# Allegro board pc042a_toplevel_16.brd
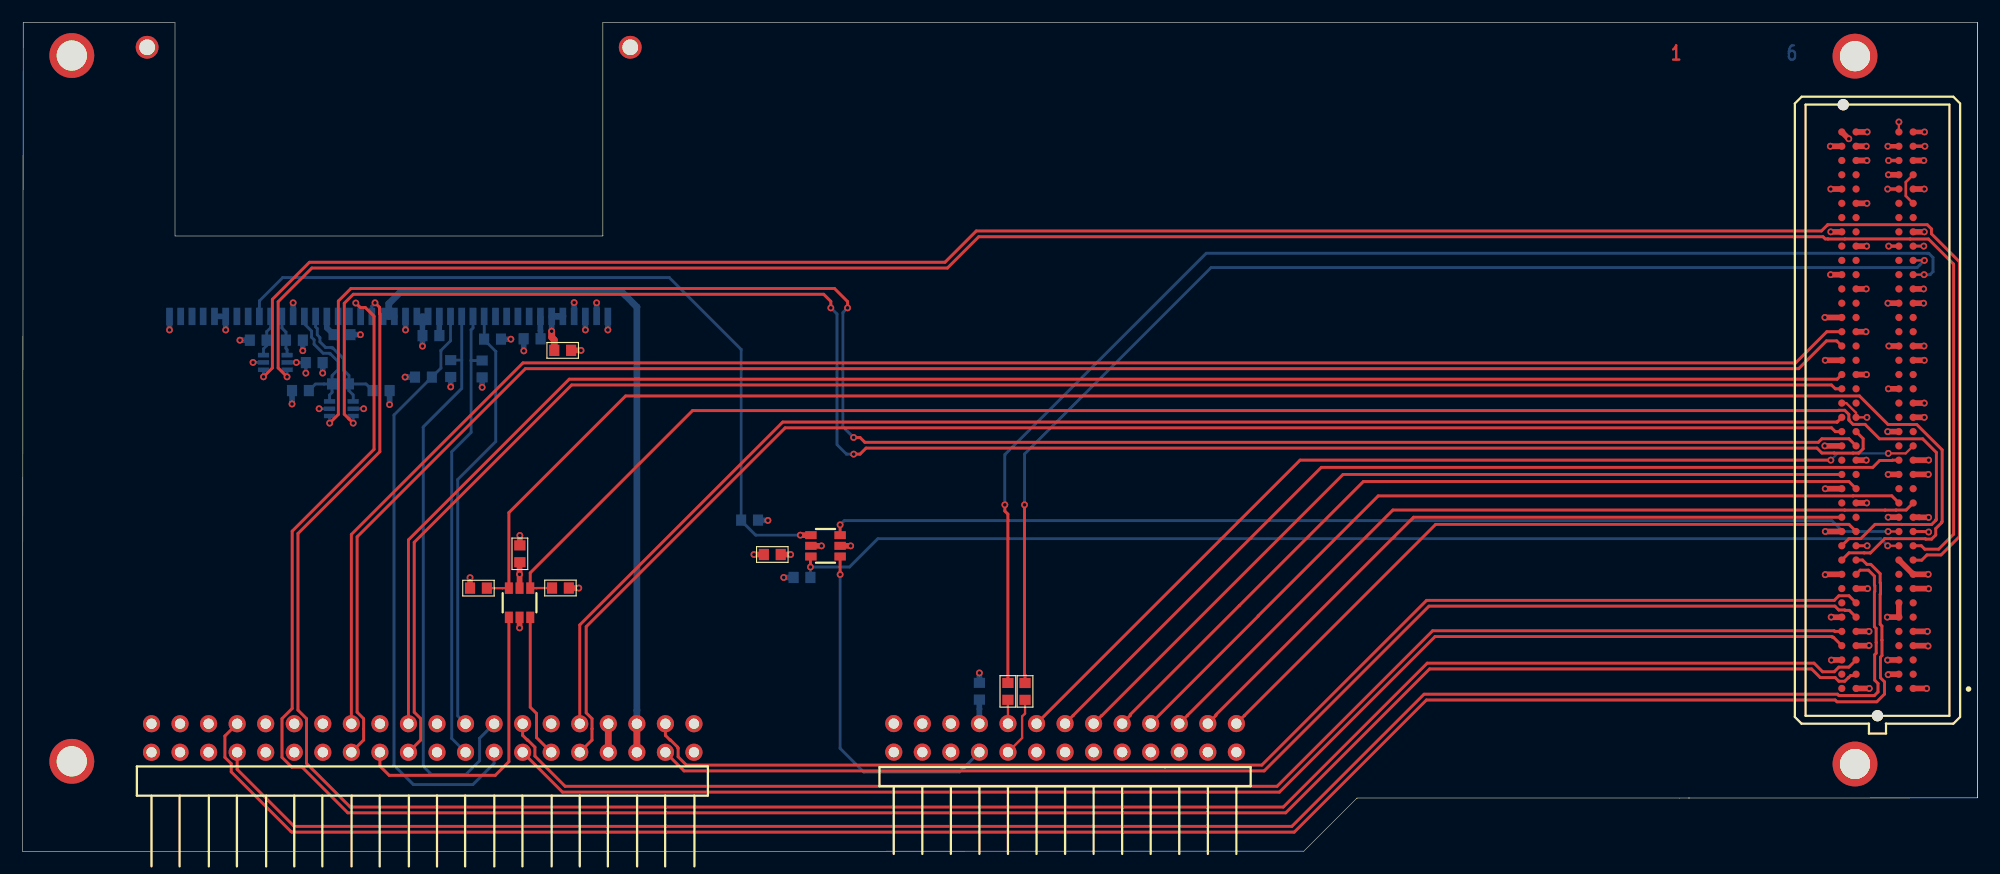
[diagram p0: board, top side]
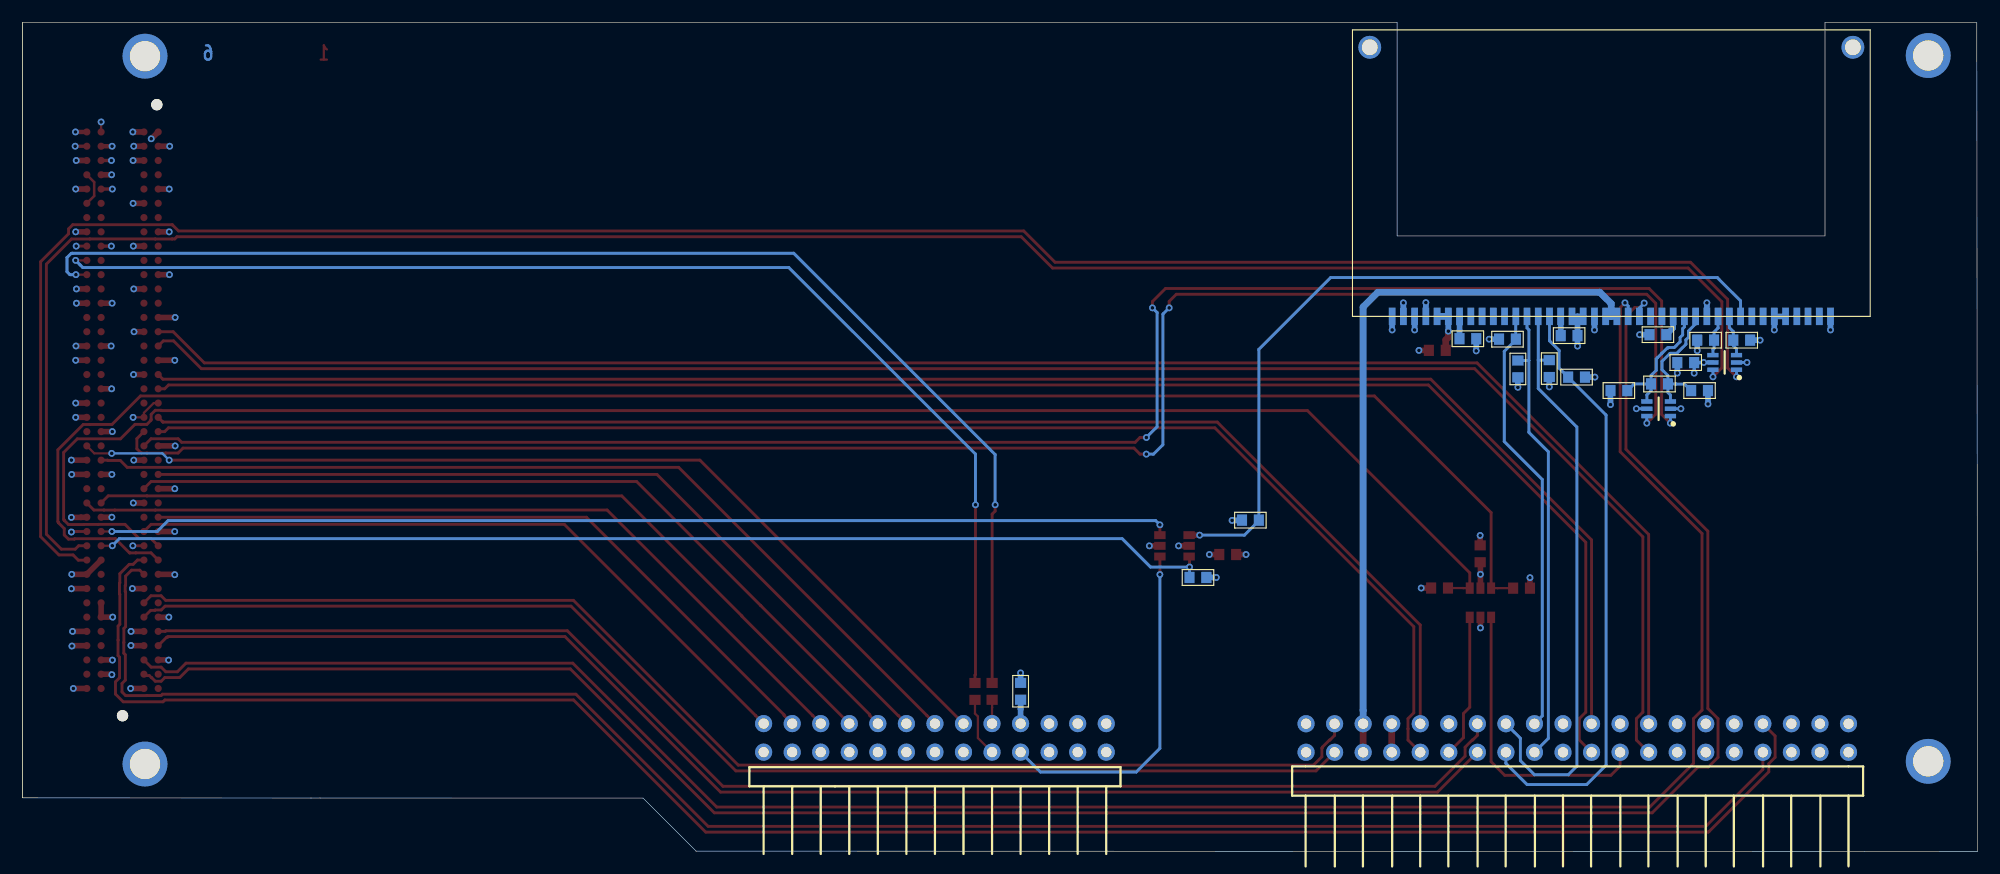
[diagram p1: board, bottom side, seen from below]

Outline 173.93 x 73.79 mm; copper layers: TOP, L2, L3, L4, L5, BOTTOM. Coordinates in mm from the lower left corner of the outline.
Outline path: 173.93,4.79 173.93,73.79 ; 0,0 10.06,0 100.6,0.03 114,0.03 118.73,4.76 147.45,4.76 148.27,4.76 148.27,4.76 173.93,4.78 173.93,4.8 173.93,73.79 51.64,73.79 51.64,54.8 51.63,54.79 13.57,54.79 13.57,73.79 0.07,73.79 0,0

## Design rules (mm)
net group FMC_LA: nets FMC_LA<1> FMC_LA<2> FMC_LA<17> FMC_LA<18> FMC_LA<20> FMC_LA<22> FMC_LA<23> FMC_LA<24> FMC_LA<25> FMC_LA<26> FMC_LA<27> FMC_LA<28> FMC_LA<29> FMC_LA<30> FMC_LA<31> FMC_LA<32> FMC_LA<33> RDATA2 RDATA3 RDATA6 RDATA7
net group FMC_LA*: nets FMC_LA*<1> FMC_LA*<2> FMC_LA*<7> FMC_LA*<8> FMC_LA*<9> FMC_LA*<10> FMC_LA*<11> FMC_LA*<12> FMC_LA*<13> FMC_LA*<14> FMC_LA*<17> FMC_LA*<18> FMC_LA*<20> FMC_LA*<22> FMC_LA*<23> FMC_LA*<24> FMC_LA*<25> FMC_LA*<26> FMC_LA*<27> FMC_LA*<28> FMC_LA*<29> FMC_LA*<30> FMC_LA*<31> FMC_LA*<32> FMC_LA*<33>

## Placement (name value [footprint] x y rotation side)
C3  100nF  [C0603]  48.06 44.61 180 top
C4  100nF  [C0603]  45.34 45.64 0 bottom
C5  100nF  [C0603]  36.34 45.92 0 bottom
C6  100nF  [C0603]  28.43 46 180 bottom
C7  1.0uF  [C0603]  66.71 26.44 0 top
C8  100nF  [C0603]  25.96 43.52 180 bottom
C9  1.0uF  [C0603]  44.25 26.5 270 top
IC1  -  [SOP65P210X110-6N]  28.37 39.41 0 bottom
IC2  -  [SOP65P210X110-6N]  22.49 43.53 0 bottom
J1  -  [CONHE13C2X20M]  11.48 11.37 90 bottom
J2  -  [CONHE13C2X13M]  77.51 11.39 270 bottom
J3  -  [SAMTEC_ASP-134606-01]  165.03 39.28 270 top
LK1  -  [FXG_M2-7]  163.03 70.79 0 top
LK2  -  [FXG_M2-7]  163.03 7.79 0 top
LK3  -  [FXG_M2-7]  4.39 8.03 0 top
LK4  -  [FXG_M2-7]  4.39 70.85 0 top
NOREF  -  []  -15.09 -78.07 0 top
NOREF#2  -  []  173.93 4.79 90 top
NOREF#3  -  []  0 0 89.9 top
NOREF#4  -  []  0.07 73.79 0 top
R1  100  [C0603]  28.29 41.61 180 bottom
R2  390  [C0603]  31.91 41.03 0 bottom
R3  390  [C0603]  24.73 41.03 180 bottom
R4  10k  [C0603]  35.67 42.23 180 bottom
R5  10k  [C0603]  38.1 42.98 270 bottom
R6  10k  [C0603]  40.89 42.95 270 bottom
R7  10k  [C0603]  41.82 45.6 0 bottom
R8  00  [C0603]  85.13 14.26 90 bottom
R9  00  [C0603]  89.19 14.25 90 top
R10  00  [C0603]  87.67 14.25 90 top
R11  1k  [C0603]  69.35 24.39 180 bottom
R12  1k  [C0603]  40.57 23.44 180 top
R13  1k  [C0603]  47.86 23.45 0 top
R14  1k  [C0603]  64.69 29.49 0 bottom
R15  24  [C0603]  24.19 45.51 180 bottom
R16  24  [C0603]  20.98 45.51 0 bottom
U1  -  [SK_SAMTEC_MB1_140_01]  13.08 47.63 270 bottom
U2  -  [SOT23_6]  72.74 26.26 90 top
U3  -  [SOT23_6]  43.27 20.84 0 top

## Library data of the parts
C3-C6 C8 = CAPCERSMDCL2: part number: CAPCERSMDCL2_0603-100NF,16V; tolerance: 10%
C7 C9 = CAPCERSMDCL2: part number: CAPCERSMDCL2_0603-1.0UF,6.3V; tolerance: 10%
IC1 IC2 = ADCMP604: part number: ADCMP604BKSZ
J1 = CON40P: part number: CON40P-BARC2X20
J2 = CON26P: part number: CON26P-BARC2X13
J3 = CON160P_40CDGH: part number: ASP-134606-01
LK1-LK4 = 1-HOLE: part number: 1-HOLE_FXG2-7-BASE
R1 = RSMD0603: part number: RSMD0603_1/10W-100,1%; tolerance: 1%
R2 R3 = RSMD0603: part number: RSMD0603_1/10W-390,1%; tolerance: 1%
R4-R7 = RSMD0603: part number: RSMD0603_1/10W-10K,1%; tolerance: 1%
R8-R10 = RSMD0603: part number: RSMD0603_-00,
R11-R14 = RSMD0603: part number: RSMD0603_1/10W-1K,1%; tolerance: 1%
R15 R16 = RSMD0603: part number: RSMD0603_1/10W-24,1%; tolerance: 1%
U1 = SK-SAMTEC-40PIN-MB1: part number: SK-SAMTEC-40PIN-MB1_RT-SMT-SAMTEC
U2 U3 = SN74AUC2G07: part number: SN74AUC2G07_SOT-TI

## Footprints (pads in the part's own frame, mm; a bottom-side part is the same pattern mirrored in y, then rotated)
C0603
  rect 0.9x1 smd: 1(-0.75,0) 2(0.75,0)
CONHE13C2X13M
  round 1.524 hole 0.914: 1(0,0) 2(2.54,0) 3(0,-2.54) 4(2.54,-2.54) 5(0,-5.08) 6(2.54,-5.08) 7(0,-7.62) 8(2.54,-7.62) 9(0,-10.16) 10(2.54,-10.16) 11(0,-12.7) 12(2.54,-12.7) 13(0,-15.24) 14(2.54,-15.24) 15(0,-17.78) 16(2.54,-17.78) 17(0,-20.32) 18(2.54,-20.32) 19(0,-22.86) 20(2.54,-22.86) 21(0,-25.4) 22(2.54,-25.4) 23(0,-27.94) 24(2.54,-27.94) 25(0,-30.48) 26(2.54,-30.48)
CONHE13C2X20M
  round 1.524 hole 0.914: 1(0,0) 2(-2.54,0) 3(0,2.54) 4(-2.54,2.54) 5(0,5.08) 6(-2.54,5.08) 7(0,7.62) 8(-2.54,7.62) 9(0,10.16) 10(-2.54,10.16) 11(0,12.7) 12(-2.54,12.7) 13(0,15.24) 14(-2.54,15.24) 15(0,17.78) 16(-2.54,17.78) 17(0,20.32) 18(-2.54,20.32) 19(0,22.86) 20(-2.54,22.86) 21(0,25.4) 22(-2.54,25.4) 23(0,27.94) 24(-2.54,27.94) 25(0,30.48) 26(-2.54,30.48) 27(0,33.02) 28(-2.54,33.02) 29(0,35.56) 30(-2.54,35.56) 31(0,38.1) 32(-2.54,38.1) 33(0,40.64) 34(-2.54,40.64) 35(0,43.18) 36(-2.54,43.18) 37(0,45.72) 38(-2.54,45.72) 39(0,48.26) 40(-2.54,48.26)
FXG_M2-7
  round 3.988 hole 2.692: 1(0,0)
SAMTEC_ASP-134606-01
  round 1 hole 1.3 unplated: (-27.19,-3.05) (27.19,0)
  round 0.64 smd: C1(24.765,3.175) C2(23.495,3.175) C3(22.225,3.175) C4(20.955,3.175) C5(19.685,3.175) C6(18.415,3.175) C7(17.145,3.175) C8(15.875,3.175) C9(14.605,3.175) C10(13.335,3.175) C11(12.065,3.175) C12(10.795,3.175) C13(9.525,3.175) C14(8.255,3.175) C15(6.985,3.175) C16(5.715,3.175) C17(4.445,3.175) C18(3.175,3.175) C19(1.905,3.175) C20(0.635,3.175) C21(-0.635,3.175) C22(-1.905,3.175) C23(-3.175,3.175) C24(-4.445,3.175) C25(-5.715,3.175) C26(-6.985,3.175) C27(-8.255,3.175) C28(-9.525,3.175) C29(-10.795,3.175) C30(-12.065,3.175) C31(-13.335,3.175) C32(-14.605,3.175) C33(-15.875,3.175) C34(-17.145,3.175) C35(-18.415,3.175) C36(-19.685,3.175) C37(-20.955,3.175) C38(-22.225,3.175) C39(-23.495,3.175) C40(-24.765,3.175) D1(24.765,1.905) D2(23.495,1.905) D3(22.225,1.905) D4(20.955,1.905) D5(19.685,1.905) D6(18.415,1.905) D7(17.145,1.905) D8(15.875,1.905) D9(14.605,1.905) D10(13.335,1.905) D11(12.065,1.905) D12(10.795,1.905) D13(9.525,1.905) D14(8.255,1.905) D15(6.985,1.905) D16(5.715,1.905) D17(4.445,1.905) D18(3.175,1.905) D19(1.905,1.905) D20(0.635,1.905) D21(-0.635,1.905) D22(-1.905,1.905) D23(-3.175,1.905) D24(-4.445,1.905) D25(-5.715,1.905) D26(-6.985,1.905) D27(-8.255,1.905) D28(-9.525,1.905) D29(-10.795,1.905) D30(-12.065,1.905) D31(-13.335,1.905) D32(-14.605,1.905) D33(-15.875,1.905) D34(-17.145,1.905) D35(-18.415,1.905) D36(-19.685,1.905) D37(-20.955,1.905) D38(-22.225,1.905) D39(-23.495,1.905) D40(-24.765,1.905) G1(24.765,-1.905) G2(23.495,-1.905) G3(22.225,-1.905) G4(20.955,-1.905) G5(19.685,-1.905) G6(18.415,-1.905) G7(17.145,-1.905) G8(15.875,-1.905) G9(14.605,-1.905) G10(13.335,-1.905) G11(12.065,-1.905) G12(10.795,-1.905) G13(9.525,-1.905) G14(8.255,-1.905) G15(6.985,-1.905) G16(5.715,-1.905) G17(4.445,-1.905) G18(3.175,-1.905) G19(1.905,-1.905) G20(0.635,-1.905) G21(-0.635,-1.905) G22(-1.905,-1.905) G23(-3.175,-1.905) G24(-4.445,-1.905) G25(-5.715,-1.905) G26(-6.985,-1.905) G27(-8.255,-1.905) G28(-9.525,-1.905) G29(-10.795,-1.905) G30(-12.065,-1.905) G31(-13.335,-1.905) G32(-14.605,-1.905) G33(-15.875,-1.905) G34(-17.145,-1.905) G35(-18.415,-1.905) G36(-19.685,-1.905) G37(-20.955,-1.905) G38(-22.225,-1.905) G39(-23.495,-1.905) G40(-24.765,-1.905) H1(24.765,-3.175) H2(23.495,-3.175) H3(22.225,-3.175) H4(20.955,-3.175) H5(19.685,-3.175) H6(18.415,-3.175) H7(17.145,-3.175) H8(15.875,-3.175) H9(14.605,-3.175) H10(13.335,-3.175) H11(12.065,-3.175) H12(10.795,-3.175) H13(9.525,-3.175) H14(8.255,-3.175) H15(6.985,-3.175) H16(5.715,-3.175) H17(4.445,-3.175) H18(3.175,-3.175) H19(1.905,-3.175) H20(0.635,-3.175) H21(-0.635,-3.175) H22(-1.905,-3.175) H23(-3.175,-3.175) H24(-4.445,-3.175) H25(-5.715,-3.175) H26(-6.985,-3.175) H27(-8.255,-3.175) H28(-9.525,-3.175) H29(-10.795,-3.175) H30(-12.065,-3.175) H31(-13.335,-3.175) H32(-14.605,-3.175) H33(-15.875,-3.175) H34(-17.145,-3.175) H35(-18.415,-3.175) H36(-19.685,-3.175) H37(-20.955,-3.175) H38(-22.225,-3.175) H39(-23.495,-3.175) H40(-24.765,-3.175)
SK_SAMTEC_MB1_140_01
  round 2.032 hole 1.4: (-23.952,-40.99) (-23.952,1.99)
  rect 1.55x0.6 smd: 1(0,0) 2(0,-1) 3(0,-2) 4(0,-3) 5(0,-4) 6(0,-5) 7(0,-6) 8(0,-7) 9(0,-8) 10(0,-9) 11(0,-10) 12(0,-11) 13(0,-12) 14(0,-13) 15(0,-14) 16(0,-15) 17(0,-16) 18(0,-17) 19(0,-18) 20(0,-19) 21(0,-20) 22(0,-21) 23(0,-22) 24(0,-23) 25(0,-24) 26(0,-25) 27(0,-26) 28(0,-27) 29(0,-28) 30(0,-29) 31(0,-30) 32(0,-31) 33(0,-32) 34(0,-33) 35(0,-34) 36(0,-35) 37(0,-36) 38(0,-37) 39(0,-38) 40(0,-39)
SOP65P210X110-6N
  rect 1x0.4 smd: 1(-1.05,0.65) 2(-1.05,0) 3(-1.05,-0.65) 4(1.05,-0.65) 5(1.05,0) 6(1.05,0.65)
SOT23_6
  rect 0.711x1.016 smd: 1(0,0) 2(0.95,0) 3(1.9,0) 4(1.9,2.6) 5(0.95,2.6) 6(0,2.6)

## Nets
GND_SIGNAL: C3.1(A<0>) C4.1(A<0>) C5.1(A<0>) C6.1(A<0>) C7.1(A<0>) C8.1(A<0>) C9.1(A<0>) IC1.2(VEE) IC2.2(VEE) J1.2(A<1>) J1.5(A<4>) J1.6(A<5>) J1.9(A<8>) J1.10(A<9>) J1.13(A<12>) J1.14(A<13>) J2.6(A<5>) J2.12(A<11>) J2.14(A<13>) J2.16(A<15>) J2.18(A<17>) J2.20(A<19>) J2.22(A<21>) J2.24(A<23>) J2.26(A<25>) J3.C1(C<1>) J3.C4(C<4>) J3.C5(C<5>) J3.C8(C<8>) J3.C9(C<9>) J3.C12(C<12>) J3.C13(C<13>) J3.C16(C<16>) J3.C17(C<17>) J3.C20(C<20>) J3.C21(C<21>) J3.C24(C<24>) J3.C25(C<25>) J3.C28(C<28>) J3.C29(C<29>) J3.C32(C<32>) J3.C33(C<33>) J3.C36(C<36>) J3.C38(C<38>) J3.C40(C<40>) J3.D2(D<2>) J3.D3(D<3>) J3.D6(D<6>) J3.D7(D<7>) J3.D10(D<10>) J3.D13(D<13>) J3.D16(D<16>) J3.D19(D<19>) J3.D22(D<22>) J3.D25(D<25>) J3.D28(D<28>) J3.D37(D<37>) J3.D39(D<39>) J3.G1(G<1>) J3.G4(G<4>) J3.G5(G<5>) J3.G8(G<8>) J3.G11(G<11>) J3.G14(G<14>) J3.G17(G<17>) J3.G20(G<20>) J3.G23(G<23>) J3.G26(G<26>) J3.G29(G<29>) J3.G32(G<32>) J3.G35(G<35>) J3.G38(G<38>) J3.G40(G<40>) J3.H3(H<3>) J3.H6(H<6>) J3.H9(H<9>) J3.H12(H<12>) J3.H15(H<15>) J3.H18(H<18>) J3.H21(H<21>) J3.H24(H<24>) J3.H27(H<27>) J3.H30(H<30>) J3.H33(H<33>) J3.H36(H<36>) J3.H39(H<39>) LK1.1(A<0>) LK2.1(A<0>) LK3.1(A<0>) LK4.1(A<0>) R15.1(A<0>) R16.1(A<0>) U1.1(A<0>) U1.5(A<4>) U1.6(A<5>) U1.12(A<11>) U1.23(A<22>) U1.24(A<23>) U1.37(A<36>) U1.38(A<37>) U1.39(A<38>) U1.40(A<39>) U2.2 U3.2
P1V5A: J1.35(A<34>) J1.36(A<35>) U1.20(A<19>) U1.21(A<20>)
P2V5: C7.2(B<0>) C8.2(B<0>) IC2.5(VCC) J3.G39(G<39>) J3.H40(H<40>) R11.2(B<0>) R12.2(B<0>) R13.2(B<0>) U2.5
P3V3: C9.2(B<0>) J3.C39(C<39>) J3.D32(D<32>) J3.D36(D<36>) J3.D38(D<38>) J3.D40(D<40>) R8.2(B<0>) R14.2(B<0>) U3.5
P5V: J1.17(A<16>)
P12V: J3.C35(C<35>) J3.C37(C<37>)
A0: J1.23(A<22>) R7.1(A<0>) U1.29(A<28>)
A1: J1.24(A<23>) R6.1(A<0>) U1.28(A<27>)
A1+: J1.12(A<11>)
A1-: J1.11(A<10>)
A2: J1.25(A<24>) R5.1(A<0>) U1.27(A<26>)
A2+: J1.4(A<3>)
A2-: J1.3(A<2>)
A3: J1.26(A<25>) R4.1(A<0>) U1.26(A<25>)
BIAS: J1.40(A<39>)
BIAS_GND: J1.39(A<38>)
CA1+: IC2.3(+IN) R16.2(B<0>) U1.10(A<9>)
CA1-: IC2.4(-IN) R15.2(B<0>) U1.11(A<10>)
CCLK_ROC+: J3.G2(G<2>) U1.18(A<17>)
CCLK_ROC-: J3.G3(G<3>) U1.19(A<18>)
CCLK_SEL: U1.4(A<3>)
CCTR+: U1.16(A<15>)
CCTR-: U1.17(A<16>)
CI2C_CLK+: U1.2(A<1>)
CI2C_CLK-: U1.3(A<2>)
CI2C_DAT+: U1.30(A<29>)
CI2C_DAT-: U1.31(A<30>)
CRESET*: R14.1(A<0>) U1.9(A<8>) U2.4(Y)
CTIN+: U1.7(A<6>)
CTIN-: U1.8(A<7>)
CTOUT+: U1.32(A<31>)
CTOUT-: U1.33(A<32>)
CTRIGOUT+: IC1.3(+IN) R1.2(B<0>) R3.1(A<0>) U1.13(A<12>)
CTRIGOUT-: IC1.4(-IN) R1.1(A<0>) R2.1(A<0>) U1.14(A<13>)
DP0_C2M: J3.C2(C<2>)
DP0_C2M*: J3.C3(C<3>)
DP0_M2C: J3.C6(C<6>)
DP0_M2C*: J3.C7(C<7>)
FA1+: IC2.1(Q) J3.C10(C<10>)
FA1-: IC2.6(Q*) J3.C11(C<11>)
FCLK_SEL_IN: J3.H10(H<10>) R12.1(A<0>) U3.6(Y)
FMC_LA*<1>: J3.D9(D<9>)
FMC_LA*<2>: J3.H8(H<8>)
FMC_LA*<7>: J3.H14(H<14>)
FMC_LA*<8>: J3.G13(G<13>)
FMC_LA*<9>: J3.D15(D<15>)
FMC_LA*<10>: J3.C15(C<15>)
FMC_LA*<11>: J3.H17(H<17>)
FMC_LA*<12>: J3.G16(G<16>)
FMC_LA*<13>: J3.D18(D<18>)
FMC_LA*<14>: J3.C19(C<19>)
FMC_LA*<17>: J3.D21(D<21>)
FMC_LA*<18>: J3.C23(C<23>)
FMC_LA*<20>: J3.G22(G<22>)
FMC_LA*<22>: J3.G25(G<25>)
FMC_LA*<23>: J3.D24(D<24>)
FMC_LA*<24>: J3.H29(H<29>)
FMC_LA*<25>: J3.G28(G<28>)
FMC_LA*<26>: J3.D27(D<27>)
FMC_LA*<27>: J3.C27(C<27>)
FMC_LA*<28>: J3.H32(H<32>)
FMC_LA*<29>: J3.G31(G<31>)
FMC_LA*<30>: J3.H35(H<35>)
FMC_LA*<31>: J3.G34(G<34>)
FMC_LA*<32>: J3.H38(H<38>)
FMC_LA*<33>: J3.G37(G<37>)
FMC_LA<1>: J3.D8(D<8>)
FMC_LA<2>: J3.H7(H<7>)
FMC_LA<17>: J3.D20(D<20>)
FMC_LA<18>: J3.C22(C<22>)
FMC_LA<20>: J3.G21(G<21>)
FMC_LA<22>: J3.G24(G<24>)
FMC_LA<23>: J3.D23(D<23>)
FMC_LA<24>: J3.H28(H<28>)
FMC_LA<25>: J3.G27(G<27>)
FMC_LA<26>: J3.D26(D<26>)
FMC_LA<27>: J3.C26(C<26>)
FMC_LA<28>: J3.H31(H<31>)
FMC_LA<29>: J3.G30(G<30>)
FMC_LA<30>: J3.H34(H<34>)
FMC_LA<31>: J3.G33(G<33>)
FMC_LA<32>: J3.H37(H<37>)
FMC_LA<33>: J3.G36(G<36>)
FMC_PRSNT_M2C_L: J3.H2(H<2>)
FMC_PWR_GOOD_FLASH_RST_B: J3.D1(D<1>)
FMC_TCK_BUF: J3.D29(D<29>)
FMC_TDO: J3.D31(D<31>)
FMC_TMS_BUF: J3.D33(D<33>)
FPGA_TDO: J3.D30(D<30>)
FPON: J3.D11(D<11>) R11.1(A<0>) U2.6(Y)
FRESET_IN*: J3.H11(H<11>) R13.1(A<0>) U3.4(Y)
FRESET_OUT*: J3.D12(D<12>) U2.3(A)
FTRIGOUT+: IC1.1(Q) J3.G18(G<18>)
FTRIGOUT-: IC1.6(Q*) J3.G19(G<19>)
GA0: J3.C34(C<34>)
GA1: J3.D35(D<35>)
GBTCLK0_M2C: J3.D4(D<4>)
GBTCLK0_M2C*: J3.D5(D<5>)
IIC_SCL_MAIN: J3.C30(C<30>) R10.2(B<0>)
IIC_SDA_MAIN: J3.C31(C<31>) R9.2(B<0>)
RCLK_ROC+: J1.28(A<27>) J3.H4(H<4>)
RCLK_ROC-: J1.27(A<26>) J3.H5(H<5>)
RCLK_SEL: J1.18(A<17>) U3.1(A)
RCTR+: J1.32(A<31>) J3.H19(H<19>)
RCTR-: J1.31(A<30>) J3.H20(H<20>)
RDATA0: J2.11(A<10>) J3.C18(C<18>)
RDATA1: J2.13(A<12>) J3.D17(D<17>)
RDATA2: J2.15(A<14>) J3.H16(H<16>)
RDATA3: J2.17(A<16>) J3.G15(G<15>)
RDATA4: J2.19(A<18>) J3.D14(D<14>)
RDATA5: J2.21(A<20>) J3.C14(C<14>)
RDATA6: J2.23(A<22>) J3.H13(H<13>)
RDATA7: J2.25(A<24>) J3.G12(G<12>)
RI2C_CLK+: J1.22(A<21>)
RI2C_CLK-: J1.21(A<20>)
RI2C_DAT+: J1.38(A<37>) J3.G6(G<6>)
RI2C_DAT-: J1.37(A<36>) J3.G7(G<7>)
RPON: J2.8(A<7>) U2.1(A)
RRESET*: J1.30(A<29>) U3.3(A)
RTIN+: J1.20(A<19>) J3.H22(H<22>)
RTIN-: J1.19(A<18>) J3.H23(H<23>)
RTOUT+: J1.16(A<15>) J3.H25(H<25>)
RTOUT-: J1.15(A<14>) J3.H26(H<26>)
RTRIGOUT+: J1.8(A<7>) J3.G9(G<9>)
RTRIGOUT-: J1.7(A<6>) J3.G10(G<10>)
SUPPLY_1: C3.2(B<0>) IC1.5(VCC) J1.33(A<32>) J1.34(A<33>) R2.2(B<0>) R3.2(B<0>) R4.2(B<0>) R5.2(B<0>) R6.2(B<0>) R7.2(B<0>) U1.22(A<21>) U1.35(A<34>) U1.36(A<35>)
TRST_L: J3.D34(D<34>)
UNNAMED_2_CAPCERSMDCL2_I501_B: C6.2(B<0>) U1.15(A<14>)
UNNAMED_2_CAPCERSMDCL2_I503_B: C5.2(B<0>) U1.25(A<24>)
UNNAMED_2_CAPCERSMDCL2_I505_B: C4.2(B<0>) U1.34(A<33>)
UNNAMED_3_CON26P_I485_A: J2.9(A<8>) R10.1(A<0>)
UNNAMED_3_CON26P_I485_A_1: J2.10(A<9>) R9.1(A<0>)
UNNAMED_3_CON26P_I485_A_2: J2.7(A<6>) R8.1(A<0>)
VREF_A_M2C: J3.H1(H<1>)

Pads without a net: J1 1 29; J2 1 2 3 4 5

## Via types
v1: diameter 0.61, hole 0.33, TOP to BOTTOM, 126 vias

## Routing (per net, layer and track width the routed paths; a pad name or vN(x,y) marks a point on that pad's centre or on a via; arc(x,y) is an arc through that point)
GND_SIGNAL: length 327.3
  TOP w0.2: v1(164.09,38.64) 163.13,38.64 163.13,39.04 162.26,39.91 161.86,39.91
  TOP w0.257: 168.21,53.88 v1(169.15,53.88) ; J3.G11 v1(164.11,27.21) ; J3.C12 169.04,28.48 169.05,28.48 169.54,28.48 v1(169.58,28.44)
  TOP w0.4: J3.D39 v1(165.96,62.77) ; 168.21,64.04 v1(169.22,64.04)
  TOP w0.5: J3.H30 v1(160.86,51.34) ; 161.86,28.48 v1(160.39,28.48) ; 166.94,15.78 166.03,15.78 v1(165.98,15.74) ; v1(165.93,17.04) 165.95,17.05 166.94,17.05 ; v1(169.55,24.67) J3.C9 166.94,25.94 ; v1(164.28,18.34) 164.27,18.32 J3.G4 ; 163.13,50.07 v1(164.03,50.07) ; 166.94,41.18 v1(166,41.18) ; 168.21,48.8 v1(169.13,48.8) ; v1(160.91,20.86) 161.02,20.86 161.03,20.85 161.74,20.85 161.76,20.86 161.86,20.86 ; J3.C13 168.21,29.75 168.73,29.75 168.74,29.74 v1(169.58,29.74) ; C7.1 v1(65.08,26.44) ; J3.H36 v1(160.88,58.96) ; 168.21,61.5 v1(169.15,61.5) ; U2.2 v1(73.68,27.21) ; v1(160.38,24.64) 160.42,24.67 161.86,24.67 ; J3.H24 v1(160.38,43.72) ; C9.1 v1(44.25,28.13) ; J3.C1 v1(169.41,14.51) ; v1(169.53,18.29) 169.5,18.32 J3.C4 ; 168.21,23.4 169.57,23.4 v1(169.58,23.39) ; 163.13,42.45 v1(164.05,42.45) ; 161.86,32.29 160.39,32.29 v1(160.38,32.29) ; v1(169.58,34.84) 169.58,34.83 J3.C17 ; v1(165.91,20.86) 166.94,20.86 166.94,22.13 ; 161.86,36.1 v1(160.35,36.1) ; J3.C5 v1(169.48,19.59) ; 161.86,17.05 161.08,17.05 161.06,17.04 v1(160.93,17.04) ; J3.D28 v1(165.96,48.8) ; J3.D25 v1(166.04,44.99) ; J3.D37 v1(166,60.23) ; J3.H27 v1(160.35,47.53) ; 163.13,61.5 v1(164.09,61.5) ; J3.G17 v1(164.03,34.83) ; J3.C21 v1(169.19,39.91) ; J3.H33 v1(160.88,55.15) ; 163.13,46.26 v1(164.01,46.26) ; J3.G14 v1(164.07,31.02) ; J3.C16 v1(169.56,33.56) ; C3.1 v1(49.69,44.61) ; 163.13,64.04 v1(164.11,64.04) ; U3.2 v1(44.22,19.9) ; J3.H39 v1(160.84,62.77) ; J3.C24 v1(169.19,43.72) ; 168.21,50.07 v1(169.13,50.07) ; 163.13,23.4 v1(164.15,23.4) ; 166.94,33.56 v1(165.98,33.56) ; 168.21,38.64 v1(169.19,38.64) ; 168.21,55.15 v1(169.19,55.15) ; 163.13,53.88 v1(164.07,53.88) ; 166.94,37.37 v1(165.94,37.37) ; 166.94,29.75 v1(165.98,29.75) ; 168.21,44.99 v1(169.17,44.99) ; J3.G1 v1(164.31,14.51) ; 168.21,58.96 v1(169.19,58.96) ; 163.13,57.69 v1(164.09,57.69) ; J3.G5 v1(164.28,19.59)
  L2 w0.226: LK3.1 7.04,8.03 ; LK3.1 4.39,10.68 ; LK3.1 6.31,6.1 ; LK3.1 1.74,8.03 ; LK3.1 2.46,6.1 ; LK3.1 2.46,9.95 ; LK3.1 6.31,9.95 ; LK3.1 4.39,5.38 ; J1.2 12.37,7.94 ; J1.2 10.59,7.94 ; J1.2 12.67,8.83 ; J1.2 10.59,9.73 ; J1.2 12.37,9.73 ; J1.2 11.48,10.02 ; J1.2 10.29,8.83 ; J1.2 11.48,7.64 ; 15.37,8.83 J1.6 ; J1.6 16.56,7.64 ; J1.6 15.67,7.94 ; J1.6 17.75,8.83 ; J1.6 16.56,10.02 ; J1.6 17.45,7.94 ; J1.6 15.67,9.73 ; J1.6 17.45,9.73 ; LK2.1 164.96,9.71 ; LK2.1 161.11,5.86 ; LK2.1 163.03,10.44 ; LK2.1 160.38,7.79 ; LK2.1 161.11,9.71 ; LK2.1 164.96,5.86 ; LK2.1 165.68,7.79 ; J2.16 96.19,7.95 ; J2.16 94.4,7.95 ; J2.16 95.29,10.04 ; J2.16 96.19,9.74 ; J2.16 94.4,9.74 ; J2.16 96.48,8.85 ; J2.16 95.29,7.66 ; J2.16 94.1,8.85 ; J1.9 22.53,10.48 ; J1.9 22.83,11.37 ; J1.9 21.64,10.18 ; J1.9 20.75,12.27 ; J1.9 20.45,11.37 ; J1.9 21.64,12.56 ; J1.9 20.75,10.48 ; J1.9 22.53,12.27 ; 81.7,7.95 J2.6 ; J2.6 81.7,9.74 ; J2.6 83.49,9.74 ; J2.6 83.78,8.85 ; J2.6 81.4,8.85 ; J2.6 83.49,7.95 ; J2.6 82.59,7.66 ; J2.6 82.59,10.04 ; J1.13 27.91,11.37 ; J1.13 27.61,10.48 ; J1.13 25.83,10.48 ; J1.13 25.83,12.27 ; J1.13 25.53,11.37 ; J1.13 26.72,12.56 ; J1.13 26.72,10.18 ; J1.13 27.61,12.27 ; J2.26 108.89,9.74 ; J2.26 106.8,8.85 ; J2.26 107.1,7.95 ; J2.26 109.18,8.85 ; J2.26 107.1,9.74 ; J2.26 107.99,7.66 ; J2.26 108.89,7.95 ; J2.26 107.99,10.04 ; 91.56,8.85 J2.14 ; J2.14 93.65,9.74 ; J2.14 91.86,9.74 ; J2.14 91.86,7.95 ; J2.14 92.75,7.66 ; J2.14 92.75,10.04 ; J2.14 93.94,8.85 ; J2.14 93.65,7.95 ; 20.75,7.94 J1.10 ; J1.10 20.75,9.73 ; J1.10 22.83,8.83 ; J1.10 22.53,9.73 ; J1.10 21.64,10.02 ; J1.10 22.53,7.94 ; J1.10 20.45,8.83 ; J1.10 21.64,7.64 ; 99.48,7.95 J2.20 ; J2.20 100.37,10.04 ; J2.20 99.48,9.74 ; J2.20 101.56,8.85 ; J2.20 100.37,7.66 ; J2.20 101.27,9.74 ; J2.20 101.27,7.95 ; J2.20 99.18,8.85 ; J1.5 17.75,11.37 ; J1.5 17.45,12.27 ; J1.5 16.56,10.18 ; J1.5 15.37,11.37 ; J1.5 16.56,12.56 ; J1.5 17.45,10.48 ; J1.5 15.67,12.27 ; J1.5 15.67,10.48 ; 2.46,68.92 LK4.1 ; LK4.1 4.39,68.2 ; LK4.1 7.04,70.85 ; LK4.1 6.31,72.77 ; LK4.1 1.74,70.85 ; LK4.1 2.46,72.77 ; LK4.1 6.31,68.92 ; 90.21,7.66 J2.12 ; J2.12 89.32,9.74 ; J2.12 91.11,9.74 ; J2.12 91.4,8.85 ; J2.12 89.32,7.95 ; J2.12 91.11,7.95 ; J2.12 89.02,8.85 ; J2.12 90.21,10.04 ; J2.18 98.73,7.95 ; J2.18 96.64,8.85 ; J2.18 97.83,7.66 ; J2.18 97.83,10.04 ; J2.18 96.94,9.74 ; J2.18 99.02,8.85 ; J2.18 98.73,9.74 ; J2.18 96.94,7.95 ; 102.02,9.74 J2.22 ; J2.22 102.02,7.95 ; J2.22 102.91,10.04 ; J2.22 103.81,7.95 ; J2.22 103.81,9.74 ; J2.22 102.91,7.66 ; J2.22 104.1,8.85 ; J2.22 101.72,8.85 ; 25.83,9.73 J1.14 ; J1.14 27.61,7.94 ; J1.14 26.72,7.64 ; J1.14 27.61,9.73 ; J1.14 25.83,7.94 ; J1.14 25.53,8.83 ; J1.14 27.91,8.83 ; J1.14 26.72,10.02 ; J2.24 106.35,9.74 ; J2.24 104.56,7.95 ; J2.24 104.56,9.74 ; J2.24 104.26,8.85 ; J2.24 106.64,8.85 ; J2.24 105.45,10.04 ; J2.24 105.45,7.66 ; J2.24 106.35,7.95 ; LK1.1 165.68,70.79 ; LK1.1 160.38,70.79 ; LK1.1 161.11,72.71 ; LK1.1 164.96,72.71 ; LK1.1 161.11,68.86 ; LK1.1 164.96,68.86 ; LK1.1 163.03,68.14
  BOTTOM w0.257: IC2.2 v1(20.51,43.53) ; IC1.2 v1(26.39,39.41)
  BOTTOM w0.5: U1.40 v1(52.08,46.42) ; U1.5 U1.6 v1(18.08,46.42) ; v1(44.6,44.56) 44.59,44.57 C4.1 ; C6.1 v1(30.06,46) ; 35.59,47.63 U1.24 ; 35.59,47.63 U1.23 ; 35.59,47.63 C5.1 v1(35.59,44.98) ; U1.39 v1(51.08,48.84) ; R16.1 v1(19.34,45.51) ; U1.38 v1(50.08,46.42) ; U1.12 24.08,48.78 24.08,48.78 v1(24.08,48.84) ; U1.1 v1(13.08,46.42) ; v1(49.08,48.86) U1.37 ; C8.1 v1(26.71,42.59) ; R15.1 v1(24.94,44.58)
P1V5A: length 64.8
  TOP w0.6: J1.36 J1.35
  BOTTOM w0.6: U1.20 32.59,47.63 ; 32.59,47.63 U1.21 ; 32.59,47.63 32.59,48.76 33.6,49.78 53.35,49.78 54.66,48.47 54.66,12.57 54.66,12.56 J1.35
P2V5: length 8.9
  TOP w0.5: R13.2 v1(49.49,23.45) ; 161.86,64.04 162.46,63.44 v1(162.48,63.44) ; C7.2 v1(68.34,26.44) ; U2.5 v1(71.08,27.21) ; R12.2 v1(39.82,24.37) ; 163.13,62.77 v1(164.03,62.77)
  BOTTOM w0.3: IC2.5 v1(24.36,43.53) 24.38,43.52 C8.2 v1(25.21,42.58)
  BOTTOM w0.5: R11.2 v1(67.72,24.39)
P3V3: length 8.8
  TOP w0.2: 166.94,64.04 v1(166.94,64.93)
  TOP w0.3: J3.D32 v1(166.03,53.88) ; J3.D36 v1(165.94,58.96) ; 168.21,62.77 v1(169.25,62.77) ; J3.D38 v1(166.02,61.5)
  TOP w0.5: C9.2 44.22,25.72 v1(44.22,24.67) U3.5
  BOTTOM w0.5: R8.2 v1(85.13,15.9) ; v1(66.32,29.47) 65.46,29.47 R14.2
P12V: length 3.1
  TOP w0.226: 168.21,60.23 167.55,59.58 167.55,58.35 168.21,57.69
A0: length 38.4
  BOTTOM w0.257: J1.23 38.72,12.07 38.72,33.11 42.11,36.5 42.11,44.51 41.07,45.55 R7.1 41.08,45.61 U1.29
A1: length 41.1
  BOTTOM w0.257: 39.91,43.7 39.91,37.31 38.18,35.58 38.18,10.07 J1.24 ; 39.91,43.7 R6.1 ; 39.91,43.7 39.91,46.43 40.08,46.6 U1.28
A2: length 52.1
  BOTTOM w0.257: U1.27 39.08,43.75 ; 39.08,43.75 39.07,43.73 R5.1 ; 39.08,43.75 39.08,41.22 35.65,37.78 35.65,7.59 36.4,6.84 39.42,6.84 40.67,8.09 40.67,10.09 J1.25
A3: length 53.4
  BOTTOM w0.2: 36.43,42.23 R4.1
  BOTTOM w0.257: U1.26 38.08,45.46 37.22,44.6 37.22,43.02 33.05,38.85 33.05,7.69 34.77,5.96 40.08,5.96 41.96,7.85 J1.26
CA1+: length 3.7
  BOTTOM w0.257: IC2.3 21.44,44.74 21.73,45.02 R16.2 21.73,46.27 22.08,46.63 U1.10
CA1-: length 3.6
  BOTTOM w0.257: U1.11 23.08,46.6 23.44,46.24 R15.2 23.44,44.78 23.54,44.68 IC2.4
CCLK_ROC+: length 194.2
  TOP w0.257: 163.13,15.78 163.01,15.66 162.65,15.66 162.46,15.47 162.43,15.47 162.12,15.15 161.6,15.15 161.27,15.48 159.94,15.48 159.17,16.25 125.19,16.25 112.38,3.45 28.94,3.45 24.87,7.52 23.95,7.52 23.09,8.38 23.09,11.83 23.99,12.73 23.99,28.52 31.28,35.8 31.28,47.64 30.49,48.42 30.05,48.42 v1(29.66,48.82)
  BOTTOM w0.257: v1(29.66,48.82) 29.66,48.78 30.08,48.36 U1.18
CCLK_ROC-: length 191.3
  TOP w0.257: J3.G3 162.48,16.41 161.6,16.41 161.18,16 160.15,16 159.39,16.77 124.97,16.77 112.17,3.96 29.16,3.96 25.27,7.85 25.27,11.83 24.51,12.59 24.51,28.3 31.79,35.59 31.79,47.85 31.76,47.88 31.76,48.44 v1(31.36,48.84)
  BOTTOM w0.257: v1(31.36,48.84) 31.36,48.83 31.08,48.55 U1.19
CRESET*: length 69.7
  TOP w0.5: U2.4 v1(69.2,28.16)
  BOTTOM w0.257: U1.9 21.08,49.01 23.16,51.09 57.54,51.09 63.94,44.69 R14.1 63.94,29.44 65.22,28.16 v1(69.2,28.16)
CTRIGOUT+: length 11.8
  BOTTOM w0.257: U1.13 25.08,46.96 25.72,46.33 25.72,45.77 25.95,45.54 25.95,45.15 26.75,44.35 27.3,44.35 27.34,44.3 27.39,44.3 28.07,43.62 28.07,42.9 27.54,42.37 R1.2 ; R1.2 26.84,41.61 26.83,41.61 26.06,41.61 R3.1 ; R1.2 27.54,40.86 27.32,40.63 IC1.3
CTRIGOUT-: length 11.7
  BOTTOM w0.257: IC1.4 29.42,40.64 29.04,41.02 R1.1 ; R2.1 31.15,41.03 30.56,41.61 R1.1 ; R1.1 29.04,42.37 28.59,42.83 28.59,43.83 28.48,43.94 28.48,43.95 28.09,44.34 28.08,44.34 27.61,44.81 27.55,44.81 27.51,44.86 26.97,44.86 26.46,45.37 26.46,45.75 26.23,45.98 26.23,46.54 26.08,46.69 U1.14
FA1+: length 191.8
  TOP w0.257: 168.21,25.94 168.22,25.93 168.96,25.93 169.43,26.4 170.69,26.4 172.32,28.03 172.32,52.49 169.83,54.98 169.83,55.42 169.46,55.79 160.61,55.79 160.58,55.75 160.57,55.75 160.05,55.23 84.85,55.23 82.07,52.45 25.53,52.45 22.23,49.15 22.23,43.04 v1(21.44,42.25)
  BOTTOM w0.257: IC2.1 v1(21.44,42.25)
FA1-: length 188.4
  TOP w0.257: v1(23.54,42.25) 22.75,43.04 22.75,48.93 25.74,51.93 82.29,51.93 85.07,54.72 160.19,54.72 160.38,54.52 160.61,54.52 160.61,54.52 162.12,54.52 162.12,54.52 167.94,54.52 167.94,54.52 169.57,54.52 171.8,52.28 171.8,28.24 170.47,26.91 169.24,26.91 168.94,27.21 J3.C11
  BOTTOM w0.257: IC2.6 23.54,42.87 v1(23.54,42.25)
FCLK_SEL_IN: length 159.6
  TOP w0.2: R12.1 42.69,23.44 42.69,23.44 U3.6
  TOP w0.257: U3.6 43.27,30.16 53.66,40.55 163.43,40.55 165.97,38.01 167.94,38.01 167.94,38.01 168.52,38.01 170.78,35.75 170.78,29.36 170.73,29.31 170.73,29.26 170.21,28.75 170.21,28.18 169.84,27.81 169.32,27.81 169.28,27.84 166.21,27.84 166.2,27.85 165.68,27.85 165.67,27.83 165.66,27.83 164.41,26.59 164.38,26.59 164.38,26.58 163.85,26.58 163.85,26.58 162.5,26.58 161.86,25.94
FPON: length 100
  TOP w0.2: 166.94,27.21 v1(165.94,27.21)
  TOP w0.257: U2.6 70.1,26.22 v1(70.1,25.32)
  BOTTOM w0.257: v1(165.94,27.21) 165.31,27.85 76.1,27.85 73.57,25.32 v1(70.1,25.32) R11.1
FRESET_IN*: length 151.6
  TOP w0.2: U3.4 45.76,23.44 45.76,23.45 R13.1
  TOP w0.257: 161.86,27.21 162.49,27.85 163.54,27.85 164.81,29.12 167.19,29.12 167.2,29.11 168.47,29.11 168.48,29.1 169.84,29.1 170.22,29.47 170.22,29.52 170.27,29.57 170.27,35.51 169.05,36.73 165.21,36.73 163.92,38.02 163.39,38.02 163.39,38.01 162.87,38.01 162.5,38.38 162.5,38.46 162.48,38.47 162.48,38.9 162.12,39.27 161.6,39.27 161.57,39.24 59.61,39.24 45.17,24.8 U3.4
FRESET_OUT*: length 95.7
  TOP w0.2: 166.94,28.48 v1(165.98,28.48)
  TOP w0.257: v1(72.74,29.08) U2.3
  BOTTOM w0.257: v1(165.98,28.48) 161.95,28.48 160.98,29.45 73.12,29.45 v1(72.74,29.08)
FTRIGOUT+: length 160.5
  TOP w0.257: 163.13,36.1 162.49,36.74 160.09,36.74 159.77,36.42 74.94,36.42 74.51,36.85 v1(73.94,36.85) ; v1(27.33,38.13) 28.1,38.9 28.1,48.99 29.22,50.11 72.24,50.11 73.4,48.95 v1(73.4,48.39)
  BOTTOM w0.257: v1(73.4,48.39) 72.99,47.97 72.99,37.81 v1(73.94,36.85) ; IC1.1 27.32,38.36 27.33,38.35 v1(27.33,38.13)
FTRIGOUT-: length 162.5
  TOP w0.257: v1(73.95,35.37) 74.51,35.37 75.05,35.91 159.65,35.91 160.09,35.47 161.18,35.47 161.18,35.46 162.86,35.46 162.86,35.47 163.34,35.47 163.35,35.47 163.39,35.47 163.75,35.84 163.75,36.74 163.13,37.37 ; v1(71.92,48.39) 71.92,48.96 71.28,49.6 29.43,49.6 28.63,48.79 28.63,38.92 29.05,38.51 29.05,38.51 v1(29.42,38.13)
  BOTTOM w0.257: v1(29.42,38.13) IC1.6 ; v1(73.95,35.37) 73.31,35.37 72.47,36.2 72.47,47.83 v1(71.92,48.39)
IIC_SCL_MAIN: length 113.7
  TOP w0.2: v1(169.18,51.34) 168.21,51.34
  TOP w0.257: R10.2 87.67,30.03 87.4,30.3 v1(87.4,30.86)
  BOTTOM w0.257: v1(169.18,51.34) 169.71,51.34 169.97,51.61 169.97,52.86 169.59,53.24 169.47,53.24 169.46,53.25 105.31,53.25 87.4,35.33 v1(87.4,30.86)
IIC_SDA_MAIN: length 108.6
  TOP w0.2: v1(169.2,52.61) 168.21,52.61
  TOP w0.257: v1(89.15,30.86) 89.15,15.75 89.19,15.71 R9.2
  BOTTOM w0.257: v1(89.15,30.86) 89.15,35.37 105.75,51.98 168.56,51.98 168.8,52.22 v1(169.2,52.61)
RCLK_ROC+: length 124.9
  TOP w0.257: 161.86,18.32 161.1,19.08 161.02,19.08 160.97,19.13 125.67,19.13 111.83,5.29 48.04,5.29 J1.28
RCLK_ROC-: length 126.5
  TOP w0.257: 161.86,19.59 161.23,19.59 161.18,19.65 125.46,19.65 111.61,5.8 48.28,5.8 45.59,8.49 45.59,9.29 44.95,9.92 44.91,9.92 44.5,10.34 J1.27
RCLK_SEL: length 26.4
  TOP w0.257: U3.1 43.27,7.99 42.06,6.78 32.62,6.78 31.8,7.6 J1.18
RCTR+: length 131
  TOP w0.257: J1.32 50.67,9.92 50.67,10.92 50.67,10.92 50.67,11.83 50.15,12.34 50.15,20.01 67.85,37.71 160.95,37.71 161.28,37.37 161.86,37.37
RCTR-: length 128.7
  TOP w0.257: J1.31 49.58,20.17 67.64,38.22 161.43,38.22 161.44,38.24 161.45,38.24 161.86,38.64
RDATA0: length 88.2
  TOP w0.2: 168.21,36.1 167.54,35.44 v1(165.99,35.44)
  TOP w0.257: v1(160.88,34.83) 113.66,34.83 J2.11
  BOTTOM w0.2: v1(160.88,34.83) 161.49,35.44 v1(165.99,35.44)
RDATA1: length 83.9
  TOP w0.257: 166.94,34.83 166.36,34.83 166.33,34.8 165.23,34.8 164.61,34.19 115.55,34.19 93.47,12.11 93.47,12.11 J2.13
RDATA2: length 75.7
  TOP w0.257: J2.15 96.01,12.11 96.03,12.11 117.49,33.56 161.86,33.56
RDATA3: length 74.5
  TOP w0.257: J3.G15 162.48,32.93 119.3,32.93 108.25,21.89 108.25,21.89 98.55,12.19 98.55,12.11 J2.17
RDATA4: length 75.2
  TOP w0.257: J2.19 109.94,20.95 109.94,20.97 120.62,31.65 162.86,31.65 162.86,31.66 166.3,31.66 166.94,31.02
RDATA5: length 73.4
  TOP w0.257: J2.21 103.63,12.11 103.63,12.11 121.92,30.39 162.11,30.39 162.12,30.39 165.72,30.39 165.72,30.39 166.68,30.39 166.68,30.39 167.58,30.39 J3.C14
RDATA6: length 64
  TOP w0.257: J2.23 106.17,12.11 106.17,12.17 123.76,29.75 161.86,29.75
RDATA7: length 62.7
  TOP w0.257: J3.G12 162.49,29.12 125.72,29.12 108.71,12.11 108.71,12.11 J2.25
RI2C_DAT+: length 113.1
  TOP w0.257: J3.G6 162.53,21.46 162.16,21.46 162.12,21.5 161.59,21.5 161.25,21.84 125.13,21.84 110.46,7.18 58.85,7.18 J1.38
RI2C_DAT-: length 115
  TOP w0.257: J3.G7 162.5,22.76 161.6,22.76 161.19,22.35 124.91,22.35 110.25,7.69 59.07,7.69 58.33,8.43 58.33,9.2 58.29,9.25 58.29,9.29 57.65,9.92 57.61,9.92 57.2,10.34 J1.37
RPON: length 31.1
  TOP w0.257: U2.1 v1(72.74,24.66)
  BOTTOM w0.257: J2.8 83.36,7.07 74.85,7.07 72.74,9.18 v1(72.74,24.66)
RRESET*: length 12.8
  TOP w0.257: U3.3 45.17,12.84 45.73,12.28 45.73,10.14 J1.30
RTIN+: length 152.3
  TOP w0.257: 161.86,41.18 161.28,41.18 160.94,41.53 48.86,41.53 34.85,27.52 34.85,12.4 35.43,11.83 35.43,9.92 34.34,8.83
RTIN-: length 150
  TOP w0.257: J3.H23 161.44,42.04 48.64,42.04 34.34,27.73 34.34,11.37
RTOUT+: length 159.4
  TOP w0.257: J1.16 30.35,9.92 30.35,10.92 30.35,10.92 30.35,11.83 29.77,12.4 29.77,28.01 44.74,42.98 158.02,42.98 160.49,45.45 161.4,45.45 J3.H25
RTOUT-: length 156.9
  TOP w0.257: J1.15 29.26,28.22 44.53,43.49 157.75,43.49 160.52,46.26 J3.H26
RTRIGOUT+: length 167.2
  TOP w0.257: J3.G9 163.5,25.04 164.23,25.04 164.76,24.51 164.76,23.7 164.79,23.67 164.79,23.14 164.76,23.11 164.76,20.01 164.91,19.86 164.91,18.61 164.92,18.6 164.92,17.65 164.78,17.51 164.78,15.25 165.08,14.96 165.08,14.2 164.75,13.88 162.86,13.88 162.86,13.88 161.6,13.88 161.48,14 124.69,14 112.93,2.24 24.17,2.24 19.1,7.31 J1.8
RTRIGOUT-: length 173.2
  TOP w0.257: J1.7 18.01,10.28 18.01,8.38 18.57,7.82 18.57,7.1 23.88,1.78 23.9,1.78 23.96,1.73 113.14,1.73 124.9,13.49 161.27,13.49 161.43,13.33 164.97,13.33 165.66,14.01 165.66,15.1 165.3,15.47 165.3,17.3 165.43,17.44 165.43,18.81 165.43,18.82 165.43,20.07 165.27,20.23 165.27,22.89 165.3,22.93 165.3,23.88 165.27,23.91 165.27,24.72 164.44,25.56 164.09,25.56 163.7,25.94 163.13,25.94
SUPPLY_1: length 34.4
  TOP w0.6: v1(47.08,46.31) 47.08,45.77 47.31,45.54 C3.2 ; J1.34 J1.33
  L3 w0.226: J1.34 53.31,8.83 ; J1.34 53.01,7.94 ; J1.34 52.12,10.02 ; J1.34 51.23,7.94 ; J1.34 52.12,7.64 ; J1.34 51.23,9.73 ; J1.34 53.01,9.73 ; J1.34 50.93,8.83 ; J1.33 52.12,12.56 ; J1.33 53.01,10.48 ; J1.33 50.93,11.37 ; J1.33 51.23,10.48 ; J1.33 53.01,12.27 ; J1.33 51.23,12.27 ; J1.33 52.12,10.18 ; J1.33 53.31,11.37
  BOTTOM w0.257: IC1.5 v1(30.35,39.41)
  BOTTOM w0.5: R7.2 v1(43.45,45.6) ; R5.2 v1(38.1,41.35) ; R3.2 v1(23.98,39.83) ; R4.2 v1(34.04,42.23) ; R2.2 v1(32.66,39.78) ; U1.35 v1(47.08,46.31) ; U1.22 v1(34.08,46.42) ; R6.2 v1(40.89,41.32)
  BOTTOM w0.6: U1.35 U1.36
UNNAMED_2_CAPCERSMDCL2_I501_B: length 1.9
  BOTTOM w0.5: U1.15 27.08,46.61 C6.2
UNNAMED_2_CAPCERSMDCL2_I503_B: length 1.7
  BOTTOM w0.5: C5.2 37.08,45.92 U1.25
UNNAMED_2_CAPCERSMDCL2_I505_B: length 2
  BOTTOM w0.5: U1.34 46.08,46.37 46.08,46.36 C4.2
UNNAMED_3_CON26P_I485_A: length 2.1
  TOP w0.2: J2.9 87.67,12.82 87.67,12.83 R10.1
UNNAMED_3_CON26P_I485_A_1: length 5.3
  TOP w0.2: J2.10 88.93,10.1 88.93,12.02 89.19,12.28 R9.1
UNNAMED_3_CON26P_I485_A_2: length 2.1
  BOTTOM w0.5: J2.7 85.13,12.68 85.13,12.69 R8.1

## Copper pours and planes (outline as drawn; the poured copper is in the pictures)
GND_SIGNAL on L2: 1.03,0.79 1.03,72.79 13.08,72.79 13.08,54.28 13.08,54.27 52.21,54.27 52.21,72.79 173.03,72.79 173.03,5.79 118.27,5.76 113.31,0.79 ; 1 cut-out
P2V5 on L5: 1.03,0.79 1.03,72.79 13.08,72.79 13.08,54.28 52.19,54.28 52.2,54.28 52.2,72.79 173.03,72.79 173.03,5.79 118.64,5.79 113.63,0.79 99.56,0.79 99.56,0.79 ; 1 cut-out
P3V3 on L4: 1.03,72.79 1.03,5.79 1.03,5.78 1.03,0.79 99.85,0.79 113.63,0.79 118.64,5.79 173.03,5.79 173.03,72.79 52.2,72.79 52.2,54.28 13.07,54.28 13.08,54.29 13.08,72.79 ; 1 cut-out
Net_4 on L3: 1.03,5.79 1.03,0.79 100.03,0.79 105.03,5.79
SUPPLY_1 on L3: 1.03,0.79 1.03,5.79 1.03,72.79 13.08,72.79 13.08,54.28 13.08,54.27 52.2,54.27 52.21,54.28 52.21,72.79 173.03,72.79 173.03,5.79 118.53,5.79 118.3,5.79 113.3,0.79 100.03,0.79 100.03,0.79 ; 1 cut-out

Small or netless copper shapes (teardrops, artwork), in the pictures only: 1 on L4

## Text on the board
BOTTOM: 6
TOP: 1
L2: 2
L3: 3
L4: 4
L5: 5
DISPLAY_BOTTOM: FIGURE | SIZE | 0.3302 | 0.9144 | 1.4 | 2.6924 | 1.3 | DRILL CHART: TOP to BOTTOM | ALL UNITS ARE IN MILLIMETERS | PLATED | NON-PLATED | QTY | 126 | 66 | 2 | 4
